# EAGLE board zfd (EAGLE 7.5.0)
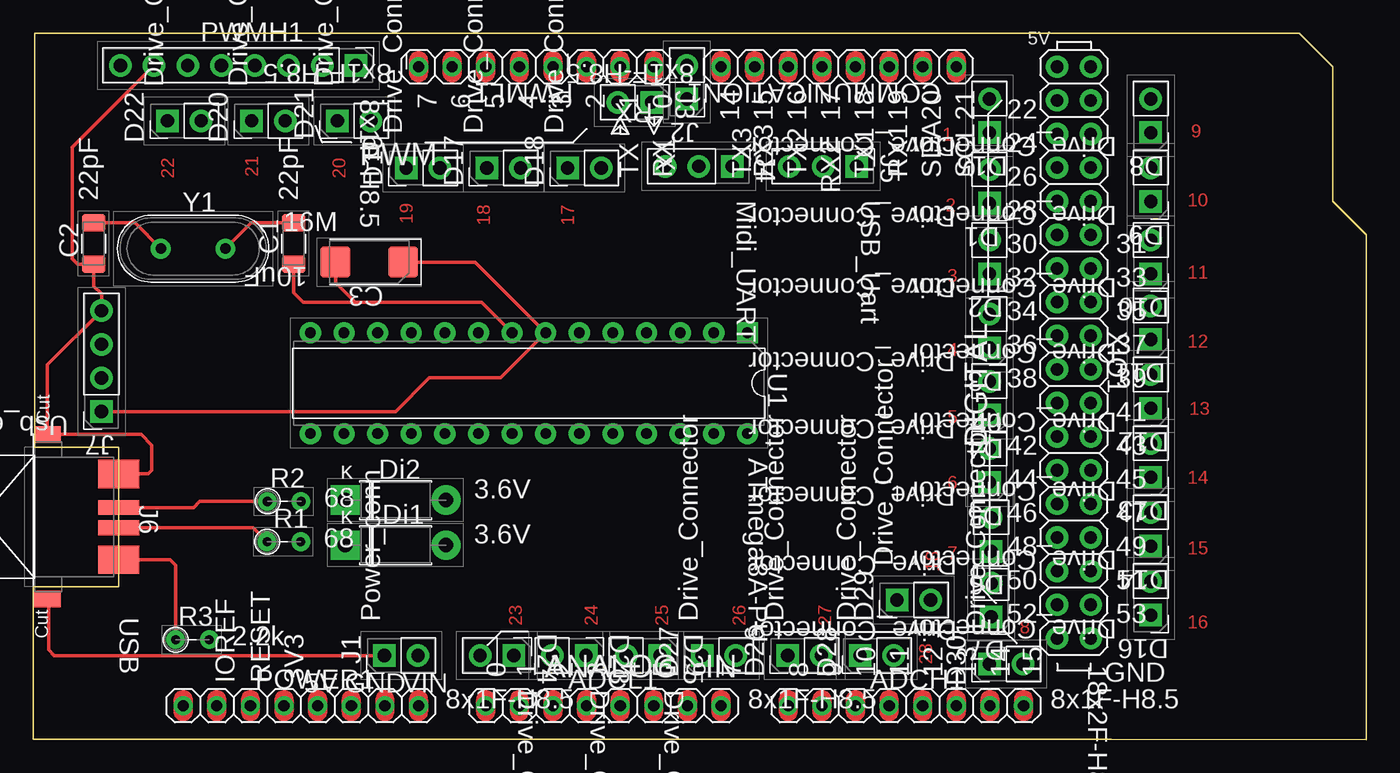
[diagram p0: board, top side]
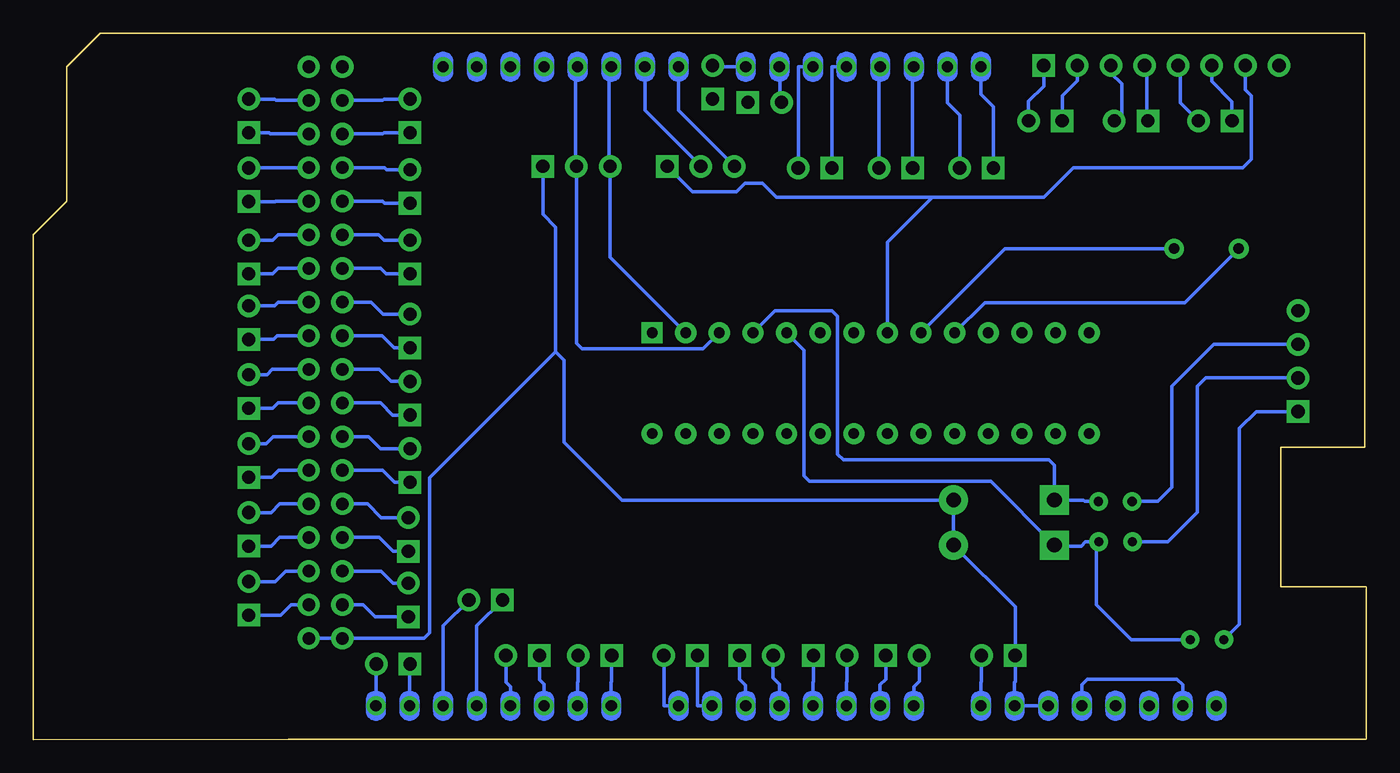
[diagram p1: board, bottom side, seen from below]

Size 100.75 x 53.37 mm. Coordinates in mm from the lower left corner, seen from the top.
Outline: 100.75,38.13 98.21,40.67 98.21,50.83 95.67,53.37 79.92,53.37 0.13,53.37 0.13,22.1 6.48,22.1 6.48,11.56 0,11.56 0,0.03 81.46,0.03 100.75,0 100.75,3.84 100.75,38.13
Copper layers (1*16): Top 0.035mm / dielectric 1.5mm / Bottom 0.035mm
Design rules "default *": minimum track width 10mil, minimum drill 0.61mm, track to track 8mil, track to pad 8mil, pad to pad 8mil, via to via 8mil, smd to smd 8mil, copper to edge 40mil, drill to drill 8mil, minimum pad ring 0mil, minimum via ring 8mil, stop-mask expansion 2mil, vias tented up to drill 20mil, thermal gap 10mil
Net classes: 0 Default: width 0.33 mm, clearance 0.3 mm, clearance 0.3 mm to class 1; 1 Default KiCad: width 0.25 mm, clearance 0.178 mm, clearance 0.178 mm to class 0

## Footprints (pad centres in the part's own frame; a part is rotated, then mirrored left to right if it is on the bottom)
P48 = drill 0.85 pad 1.422: 1 -8.89,0; 2 -6.35,0; 3 -3.81,0; 4 -1.27,0; 5 1.27,0; 6 3.81,0; 7 6.35,0; 8 8.89,0
P22 = smd 1.325 x 1.8: 1 -1.562,0; 2 1.562,0
P1 = smd 2.25 x 2.35: 1 -2.55,0; 2 2.55,0
P10 = drill 1 pad 1.7 square: 1 0,0 | drill 1 pad 1.7: 2 0,-2.54
P8 = drill 1.1 pad 2.2 square: 1 0,0 | drill 1.1 pad 2.2: 2 7.62,0
P25 = drill 1 pad 1.7 square: 1 0,0 | drill 1 pad 1.7: 2 0,-2.54; 3 0,-5.08
P7 = smd 2.132 x 3.1: 1 2.54,5.691; 4@ -3.937,5.691 | smd 1.116 x 3.1: 2 0.127,5.691; 3 -1.397,5.691 | smd 1.243 x 2.005: 4 -6.921,0.317; 4@_1 5.524,0.317
P0 = drill 1 pad 1.7 square: 1 0,0 | drill 1 pad 1.7: 2 0,-2.54; 3 0,-5.08; 4 0,-7.62
P47 = drill 1 pad 1.7 square: 1 0,0 | drill 1 pad 1.7: 2 0,-2.54; 3 0,-5.08; 4 0,-7.62; 5 0,-10.16; 6 0,-12.7; 7 0,-15.24; 8 0,-17.78
P4 = drill 0.7 pad 1.4: 1 0,0; 2 2.54,0
P3 = drill 0.8 pad 1.6 square: 1 0,0 | drill 0.8 pad 1.6: 2 0,-2.54; 3 0,-5.08; 4 0,-7.62; 5 0,-10.16; 6 0,-12.7; 7 0,-15.24; 8 0,-17.78; 9 0,-20.32; 10 0,-22.86; 11 0,-25.4; 12 0,-27.94; 13 0,-30.48; 14 0,-33.02; 15 7.62,-33.02; 16 7.62,-30.48; 17 7.62,-27.94; 18 7.62,-25.4; 19 7.62,-22.86; 20 7.62,-20.32; 21 7.62,-17.78; 22 7.62,-15.24; 23 7.62,-12.7; 24 7.62,-10.16; 25 7.62,-7.62; 26 7.62,-5.08; 27 7.62,-2.54; 28 7.62,0
P52 = drill 0.95 pad 1.676: 1 -21.59,-1.27; 2 -21.59,1.27; 3 -19.05,-1.27; 4 -19.05,1.27; 5 -16.51,-1.27; 6 -16.51,1.27; 7 -13.97,-1.27; 8 -13.97,1.27; 9 -11.43,-1.27; 10 -11.43,1.27; 11 -8.89,-1.27; 12 -8.89,1.27; 13 -6.35,-1.27; 14 -6.35,1.27; 15 -3.81,-1.27; 16 -3.81,1.27; 17 -1.27,-1.27; 18 -1.27,1.27; 19 1.27,-1.27; 20 1.27,1.27; 21 3.81,-1.27; 22 3.81,1.27; 23 6.35,-1.27; 24 6.35,1.27; 25 8.89,-1.27; 26 8.89,1.27; 27 11.43,-1.27; 28 11.43,1.27; 29 13.97,-1.27; 30 13.97,1.27; 31 16.51,-1.27; 32 16.51,1.27; 33 19.05,-1.27; 34 19.05,1.27; 35 21.59,-1.27; 36 21.59,1.27
P2 = drill 0.8 pad 1.5: 1 0,0; 2 4.88,0

## Placement (x,y rotation side)
ADCH1  8x1F-H8.5  [P48]  65.95,2.57 0 top
ADCL1  8x1F-H8.5  [P48]  43.09,2.57 0 top
C1  22pF  [P22]  19.69,37.47 90 top
C2  22pF  [P22]  4.57,37.47 90 top
C3  10uF  [P1]  25.4,36.07 180 top
COMMUNICATION1  8x1F-H8.5  [P48]  60.87,50.83 180 top
D1  Drive_Connector  [P10]  72.26,40.51 180 top
D2  Drive_Connector  [P10]  72.26,35.18 180 top
D3  Drive_Connector  [P10]  72.26,29.59 180 top
D4  Drive_Connector  [P10]  72.26,24.51 180 top
D5  Drive_Connector  [P10]  72.26,19.43 180 top
D6  Drive_Connector  [P10]  72.39,14.22 180 top
D7  Drive_Connector  [P10]  72.39,9.27 180 top
D8  Drive_Connector  [P10]  84.46,45.85 180 top
D9  Drive_Connector  [P10]  84.46,40.64 180 top
D10  Drive_Connector  [P10]  84.46,35.18 180 top
D11  Drive_Connector  [P10]  84.46,30.23 180 top
D12  Drive_Connector  [P10]  84.46,25.02 180 top
D13  Drive_Connector  [P10]  84.46,19.81 180 top
D14  Drive_Connector  [P10]  84.46,14.61 180 top
D15  Drive_Connector  [P10]  72.26,45.85 180 top
D16  Drive_Connector  [P10]  84.46,9.4 180 top
D17  Drive_Connector  [P10]  34.29,43.18 90 top
D18  Drive_Connector  [P10]  40.39,43.18 90 top
D19  Drive_Connector  [P10]  28.19,43.18 90 top
D20  Drive_Connector  [P10]  16.51,46.74 90 top
D21  Drive_Connector  [P10]  22.99,46.74 90 top
D22  Drive_Connector  [P10]  10.16,46.74 90 top
D23  Drive_Connector  [P10]  41.78,6.35 270 top
D24  Drive_Connector  [P10]  36.32,6.35 270 top
D25  Drive_Connector  [P10]  47.37,6.35 270 top
D26  Drive_Connector  [P10]  57.02,6.35 90 top
D27  Drive_Connector  [P10]  50.55,6.35 90 top
D28  Drive_Connector  [P10]  62.48,6.35 90 top
D29  Drive_Connector  [P10]  65.28,10.54 90 top
D30  Drive_Connector  [P10]  72.26,5.72 90 top
Di1  3.6V  [P8]  23.58,14.69 0 top
Di2  3.6V  [P8]  23.58,18.09 0 top
J1  Power_conn  [P10]  26.54,6.35 90 top
J2  RX  [P10]  49.4,48.39 180 top
J3  TX  [P10]  46.74,48.13 270 top
J4  Midi_UART  [P25]  52.83,43.31 270 top
J5  USB_Uart  [P25]  62.23,43.31 270 top
J6  USB  [P7]  0.76,16.13 270 top
J7  Usb_ext  [P0]  5.17,24.78 180 top
POWER1  8x1F-H8.5  [P48]  20.23,2.57 0 top
PWMH1  8x1F-H8.5  [P47]  24.38,50.93 270 top
PWML1  8x1F-H8.5  [P48]  38.01,50.83 180 top
R1  68  [P4]  17.69,14.94 0 top
R2  68  [P4]  17.71,17.99 0 top
R3  2.2k  [P4]  10.77,7.54 0 top
U1  ATmega8A-PU  [P3]  53.98,30.73 270 top
XIO1  18x2F-H8.5  [P52]  78.65,29.24 270 top
Y1  16M  [P2]  9.65,37.08 0 top

## Library data of the parts
ADCH1 ADCL1 C1-C3 COMMUNICATION1 D1-D30 Di1 Di2 J1-J7 POWER1 PWMH1 PWML1 R1-R3 U1 XIO1 Y1 = common

## Nets
/+5v [Default KiCad]: POWER1.2 POWER1.5
/adc0 [Default KiCad]: ADCL1.1 D24.2
/adc1 [Default KiCad]: ADCL1.2 D24.1
/adc2 [Default KiCad]: ADCL1.3 D23.2
/adc3 [Default KiCad]: ADCL1.4 D23.1
/adc4 [Default KiCad]: ADCL1.5 D25.2
/adc5 [Default KiCad]: ADCL1.6 D25.1
/adc6 [Default KiCad]: ADCL1.7 D27.1
/adc7 [Default KiCad]: ADCL1.8 D27.2
/adc8 [Default KiCad]: ADCH1.1 D26.1
/adc9 [Default KiCad]: ADCH1.2 D26.2
/adc10 [Default KiCad]: ADCH1.3 D28.1
/adc11 [Default KiCad]: ADCH1.4 D28.2
/adc12 [Default KiCad]: ADCH1.5 D29.1
/adc13 [Default KiCad]: ADCH1.6 D29.2
/adc14 [Default KiCad]: ADCH1.7 D30.1
/adc15 [Default KiCad]: ADCH1.8 D30.2
/d+ [Default KiCad]: Di2.1 R2.2 U1.4
/d- [Default KiCad]: Di1.1 R1.2 R3.2 U1.5
/dir1 [Default KiCad]: D15.2 XIO1.3
/dir2 [Default KiCad]: D1.2 XIO1.7
/dir3 [Default KiCad]: D2.2 XIO1.11
/dir4 [Default KiCad]: D3.2 XIO1.15
/dir5 [Default KiCad]: D4.2 XIO1.19
/dir6 [Default KiCad]: D5.2 XIO1.23
/dir7 [Default KiCad]: D6.2 XIO1.27
/dir8 [Default KiCad]: D7.2 XIO1.31
/dir9 [Default KiCad]: D8.2 XIO1.4
/dir10 [Default KiCad]: D9.2 XIO1.8
/dir11 [Default KiCad]: D10.2 XIO1.12
/dir12 [Default KiCad]: D11.2 XIO1.16
/dir13 [Default KiCad]: D12.2 XIO1.20
/dir14 [Default KiCad]: D13.2 XIO1.24
/dir15 [Default KiCad]: D14.2 XIO1.28
/dir16 [Default KiCad]: D16.2 XIO1.32
/dir17 [Default KiCad]: D18.2 PWML1.3
/dir18 [Default KiCad]: D17.2 PWML1.5
/dir19 [Default KiCad]: D19.2 PWML1.7
/dir20 [Default KiCad]: D21.2 PWMH1.1
/dir21 [Default KiCad]: D20.2 PWMH1.3
/dir22 [Default KiCad]: D22.2 PWMH1.5
/p24 [Default KiCad]: D15.1 XIO1.5
/p25 [Default KiCad]: D8.1 XIO1.6
/p28 [Default KiCad]: D1.1 XIO1.9
/p29 [Default KiCad]: D9.1 XIO1.10
/p32 [Default KiCad]: D2.1 XIO1.13
/p33 [Default KiCad]: D10.1 XIO1.14
/p36 [Default KiCad]: D3.1 XIO1.17
/p37 [Default KiCad]: D11.1 XIO1.18
/p40 [Default KiCad]: D4.1 XIO1.21
/p41 [Default KiCad]: D12.1 XIO1.22
/p44 [Default KiCad]: D5.1 XIO1.25
/p45 [Default KiCad]: D13.1 XIO1.26
/p48 [Default KiCad]: D6.1 XIO1.29
/p49 [Default KiCad]: D14.1 XIO1.30
/p52 [Default KiCad]: D7.1 XIO1.33
/p53 [Default KiCad]: D16.1 XIO1.34
/pb5 [Default KiCad]: D20.1 PWMH1.4
/pb7 [Default KiCad]: D22.1 PWMH1.6
/pe0 [Default KiCad]: J2.2 PWML1.1
/pe1 [Default KiCad]: J3.2 PWML1.2
/pe3 [Default KiCad]: D17.1 PWML1.6
/pe5 [Default KiCad]: D18.1 PWML1.4
/ph4 [Default KiCad]: D19.1 PWML1.8
/ph6 [Default KiCad]: D21.1 PWMH1.2
/rxd2 [Default KiCad]: COMMUNICATION1.5 J5.2 U1.3
/rxd3 [Default KiCad]: COMMUNICATION1.7 J4.2
/txd2 [Default KiCad]: COMMUNICATION1.6 J5.3 U1.2
/txd3 [Default KiCad]: COMMUNICATION1.8 J4.3
/u_vcc [Default KiCad]: C3.1 J6.1 J7.1 R3.1 U1.7
/vin [Default KiCad]: J1.2 POWER1.8
gnd [Default KiCad]: C1.1 C2.1 C3.2 Di1.2 Di2.2 J1.1 J4.1 J5.1 J6.4 J6.4@ J6.4@_1 J7.4 POWER1.6 POWER1.7 PWMH1.7 U1.8 XIO1.35 XIO1.36
net-(c1-pad2) [Default KiCad]: C1.2 U1.9 Y1.2
net-(c2-pad2) [Default KiCad]: C2.2 U1.10 Y1.1
net-(j6-pad2) [Default KiCad]: J6.2 J7.2 R1.1
net-(j6-pad3) [Default KiCad]: J6.3 J7.3 R2.1

## Tracks (layer width: path | path; a pad name or v marks a point on that pad's centre or on a via)
/+5v
  Bottom 0.25: POWER1.2 13.88,4.13 14.31,4.56 21.07,4.56 21.5,4.13 POWER1.5
/adc0
  Bottom 0.25: D24.2 33.78,4.43 34.2,4.01 ADCL1.1
/adc1
  Bottom 0.25: D24.1 36.32,4.55 36.74,4.13 ADCL1.2
/adc2
  Bottom 0.25: D23.2 39.24,4.36 39.28,4.32 ADCL1.3
/adc3
  Bottom 0.25: D23.1 41.78,4.36 41.82,4.32 ADCL1.4
/adc4
  Bottom 0.25: D25.2 44.83,4.67 44.36,4.2 ADCL1.5
/adc5
  Bottom 0.25: D25.1 47.37,4.58 46.9,4.11 ADCL1.6
/adc6
  Bottom 0.25: D27.1 50.55,2.57 ADCL1.7
/adc7
  Bottom 0.25: D27.2 53.09,2.57 ADCL1.8
/adc8
  Bottom 0.25: D26.1 57.02,4.36 57.06,4.32 ADCH1.1
/adc9
  Bottom 0.25: D26.2 59.56,4.36 59.6,4.32 ADCH1.2
/adc10
  Bottom 0.25: D28.1 62.48,4.51 62.14,4.17 ADCH1.3
/adc11
  Bottom 0.25: D28.2 65.02,4.35 64.68,4.01 ADCH1.4
/adc12
  Bottom 0.25: D29.1 67.22,8.6 ADCH1.5
/adc13
  Bottom 0.25: D29.2 69.76,8.6 ADCH1.6
/adc14
  Bottom 0.25: D30.1 72.3,5.68 ADCH1.7
/adc15
  Bottom 0.25: D30.2 74.84,5.68 ADCH1.8
/d+
  Bottom 0.25: R2.2 21.27,17.99 21.37,18.09 Di2.1 23.58,20.71 24.01,21.14 39.53,21.14 39.96,21.56 39.96,31.96 40.39,32.39 44.7,32.39 U1.4
/d-
  Bottom 0.25: R3.2 17.77,7.54 20.4,10.17 20.4,14.94 R1.2 21.23,14.94 21.55,14.62 23.58,14.62 Di1.1 28.38,19.5 42.07,19.5 42.5,19.93 42.5,29.42 U1.5
/dir1
  Bottom 0.25: D15.2 74.22,48.39 74.32,48.29 XIO1.3
/dir2
  Bottom 0.25: D1.2 74.05,43.05 74.2,43.21 XIO1.7
/dir3
  Bottom 0.25: D2.2 74.22,37.72 74.63,38.13 XIO1.11
/dir4
  Bottom 0.25: D3.2 74.31,32.13 75.22,33.05 XIO1.15
/dir5
  Bottom 0.25: D4.2 73.68,27.05 74.6,27.97 XIO1.19
/dir6
  Bottom 0.25: D5.2 74.5,21.97 75.42,22.89 XIO1.23
/dir7
  Bottom 0.25: D6.2 74.44,16.76 75.48,17.81 XIO1.27
/dir8
  Bottom 0.25: D7.2 73.54,11.81 74.46,12.73 XIO1.31
/dir9
  Bottom 0.25: D8.2 82.5,48.39 82.4,48.29 XIO1.4
/dir10
  Bottom 0.25: D9.2 82.46,43.18 82.43,43.21 XIO1.8
/dir11
  Bottom 0.25: D10.2 82.65,37.72 82.24,38.13 XIO1.12
/dir12
  Bottom 0.25: D11.2 82.52,32.77 82.23,33.05 XIO1.16
/dir13
  Bottom 0.25: D12.2 83.08,27.56 82.67,27.97 XIO1.20
/dir14
  Bottom 0.25: D13.2 83.14,22.35 82.61,22.89 XIO1.24
/dir15
  Bottom 0.25: D14.2 82.78,17.14 82.12,17.81 XIO1.28
/dir16
  Bottom 0.25: D16.2 82.47,11.94 81.68,12.73 XIO1.32
/dir17
  Bottom 0.25: D18.2 42.93,50.83 PWML1.3
/dir18
  Bottom 0.25: D17.2 36.83,50.26 36.74,50.35 PWML1.5
/dir19
  Bottom 0.25: D19.2 30.73,47.17 31.66,48.1 PWML1.7
/dir20
  Bottom 0.25: D21.2 25.53,48.2 24.38,49.35 PWMH1.1
/dir21
  Bottom 0.25: D20.2 18.5,46.74 18.5,49.54 19.3,50.35 PWMH1.3
/dir22
  Bottom 0.25: D22.2 14.05,48.09 14.05,50.93 PWMH1.5
/p24
  Bottom 0.25: D15.1 74.22,45.85 74.32,45.75 XIO1.5
/p25
  Bottom 0.25: D8.1 82.93,45.85 82.82,45.75 XIO1.6
/p28
  Bottom 0.25: D1.1 74.2,40.51 74.35,40.67 XIO1.9
/p29
  Bottom 0.25: D9.1 82.46,40.64 82.43,40.67 XIO1.10
/p32
  Bottom 0.25: D2.1 74.07,35.18 74.47,35.59 XIO1.13
/p33
  Bottom 0.25: D10.1 82.65,35.18 82.24,35.59 XIO1.14
/p36
  Bottom 0.25: D3.1 73.45,29.59 74.37,30.51 XIO1.17
/p37
  Bottom 0.25: D11.1 82.59,30.23 82.31,30.51 XIO1.18
/p40
  Bottom 0.25: D4.1 73.59,24.51 74.51,25.43 XIO1.21
/p41
  Bottom 0.25: D12.1 82.65,25.02 82.24,25.43 XIO1.22
/p44
  Bottom 0.25: D5.1 73.42,19.43 74.33,20.35 XIO1.25
/p45
  Bottom 0.25: D13.1 82.71,19.81 82.18,20.35 XIO1.26
/p48
  Bottom 0.25: D6.1 73.54,14.22 74.59,15.27 XIO1.29
/p49
  Bottom 0.25: D14.1 82.78,14.61 82.12,15.27 XIO1.30
/p52
  Bottom 0.25: D7.1 74.9,9.27 75.81,10.19 XIO1.33
/p53
  Bottom 0.25: D16.1 82.03,9.4 81.24,10.19 XIO1.34
/pb5
  Bottom 0.25: D20.1 16.59,46.74 16.59,50.93 PWMH1.4
/pb7
  Bottom 0.25: D22.1 10.16,48.19 11.68,49.71 PWMH1.6
/pe0
  Bottom 0.25: J2.2 49.3,50.83 PWML1.1
/pe1
  Bottom 0.25: J3.2 44.32,48.26 44.32,50.83 PWML1.2
/pe3
  Bottom 0.25: D17.1 34.29,50.83 PWML1.6
/pe5
  Bottom 0.25: D18.1 40.39,50.83 PWML1.4
/ph4
  Bottom 0.25: D19.1 28.19,47.81 29.12,48.74 PWML1.8
/ph6
  Bottom 0.25: D21.1 22.99,48.62 21.84,49.76 PWMH1.2
/rxd2
  Bottom 0.25: COMMUNICATION1.5 59.77,50.83 59.77,43.39 J5.2 59.69,29.94 59.26,29.51 50.12,29.51 U1.3
/rxd3
  Bottom 0.25: COMMUNICATION1.7 54.52,47.54 J4.2
/txd2
  Bottom 0.25: COMMUNICATION1.6 57.23,50.83 57.23,43.39 J5.3 57.15,36.45 U1.2
/txd3
  Bottom 0.25: J4.3 51.98,47.54 COMMUNICATION1.8
/u_vcc
  Top 0.25: C3.1 33.4,36.07 U1.7 35.32,27.32 29.93,27.32 27.39,24.78 J7.1 | R3.1 10.77,13.16 10.34,13.59 J6.1
  Bottom 0.25: R3.1 9.61,8.71 9.61,23.51 8.34,24.78 J7.1
/vin
  Bottom 0.25: J1.2 29.08,4.36 29.12,4.32 POWER1.8
gnd
  Top 0.25: J1.1 1.62,6.35 1.19,6.78 1.19,10.61 J6.4@_1 | J6.4@ 8.71,20.07 8.97,20.33 8.97,22.24 8.16,23.05 J6.4 1.08,28.31 J7.4 5.17,33.66 4.57,34.26 C2.1 3.37,35.9 2.94,36.33 2.94,44.73 PWMH1.7 | C1.1 19.69,33.75 20.4,33.03 24.34,33.03 | 24.34,33.03 33.9,33.03 U1.8 | C3.2 22.85,34.52 24.34,33.03
  Bottom 0.25: XIO1.36 XIO1.35 71.2,7.65 70.78,8.07 70.78,19.76 61.26,29.28 | POWER1.6 POWER1.7 26.58,4.32 26.54,4.36 J1.1 26.54,10.04 Di1.2 Di2.2 56.26,18.09 60.63,22.45 60.63,28.65 61.26,29.28 | J4.1 50.93,41.4 47.58,41.4 46.95,42.03 45.65,42.03 44.59,40.97 32.78,40.97 | 32.78,40.97 24.37,40.97 22.15,43.19 9.35,43.19 8.72,43.82 8.72,48.65 9.14,49.08 PWMH1.7 | 61.26,29.28 61.26,38.71 62.23,39.69 J5.1 | U1.8 36.2,37.56 32.78,40.97
net-(c1-pad2)
  Top 0.25: Y1.2 16.48,39.03 C1.2
  Bottom 0.25: Y1.2 27.31,37.08 U1.9
net-(c2-pad2)
  Top 0.25: Y1.1 7.71,39.03 C2.2
  Bottom 0.25: Y1.1 13.73,33.01 28.84,33.01 U1.10
net-(j6-pad2)
  Top 0.25: R1.1 16.63,16 J6.2
  Bottom 0.25: J7.2 12.15,27.32 12.78,26.68 12.78,17.16 15,14.94 R1.1
net-(j6-pad3)
  Top 0.25: R2.1 12.61,17.99 12.14,17.53 J6.3
  Bottom 0.25: J7.3 11.51,29.86 14.69,26.68 14.69,19.06 15.76,17.99 R2.1

## Text on the board
Top: 1 | 9 | 21 | 22 | 20 | 2 | 10 | 19 | 18 | 17 | 11 | 3 | 4 | 12 | 5 | 13 | 6 | 14 | 15 | 18 | 7 | 23 | 24 | 25 | 26 | 27 | 8 | 16 | 28
tPlace: PWMH1 | 5V | Drive_Connector | Drive_Connector | Drive_Connector | 8x1F-H8.5 | PWML1 | 8x1F-H8.5 | COMMUNICATION1 | 8x1F-H8.5 | J3 | 7 | 6 | 5 | 4 | 3 | 2 | 1 | 0 | 22 | RX | J2 | 14 | 15 | 16 | 17 | 18 | 19 | 20 | 21 | D21 | Drive_Connector | Drive_Connector | Drive_Connector | TX | D22 | D20 | PWM | J4 | J5 | 24 | Drive_Connector | D15 | Drive_Connector | D8 | TX | RX | TX3 | RX3 | TX2 | TX1 | RX1 | SDA | SCL | 26 | D19 | D17 | D18 | RX2 | 22pF | 22pF | Midi_UART | USB_Uart | Y1 | 16M | 28 | Drive_Connector | D1 | Drive_Connector | D9 | 30 | 31 | C2 | C1 | 10uF | C3 | 32 | 33 | Drive_Connector | D2 | Drive_Connector | D10 | 34 | 35 | XIO1 | 36 | 37 | Drive_Connector | D11 | U1 | Drive_Connector | D3 | 38 | 39 | 41 | 40 | Drive_Connector | D12 | Usb_ext | J7 | Drive_Connector | D4 | 42 | 43 | ATmega8A-PU | DIGITAL | Di2 | 3.6V | 44 | 45 | R2 | 68 | J6 | Drive_Connector | D5 | Drive_Connector | D13 | Di1 | 3.6V | 46 | 47 | R1 | 68 | 48 | 49 | Drive_Connector | Drive_Connector | D6 | Drive_Connector | D14 | 50 | 51 | USB | 52 | 53 | R3 | 2.2k | Power_conn | Drive_Connector | Drive_Connector | Drive_Connector | D29 | Drive_Connector | D24 | D23 | D25 | Drive_Connector | D7 | Drive_Connector | D16 | J1 | ANALOG IN | 18x2F-H8.5 | IOREF | RESET | 3V3 | 5V | GND | VIN | 0 | 1 | 2 | 3 | 4 | 5 | D27 | 6 | 7 | D26 | 8 | 9 | D28 | 10 | 11 | 12 | 13 | 14 | 15 | GND | POWER1 | 8x1F-H8.5 | Drive_Connector | ADCL1 | Drive_Connector | Drive_Connector | 8x1F-H8.5 | ADCH1 | D30 | 8x1F-H8.5